# EAGLE board midi_shield48_v1 (EAGLE 6.2)
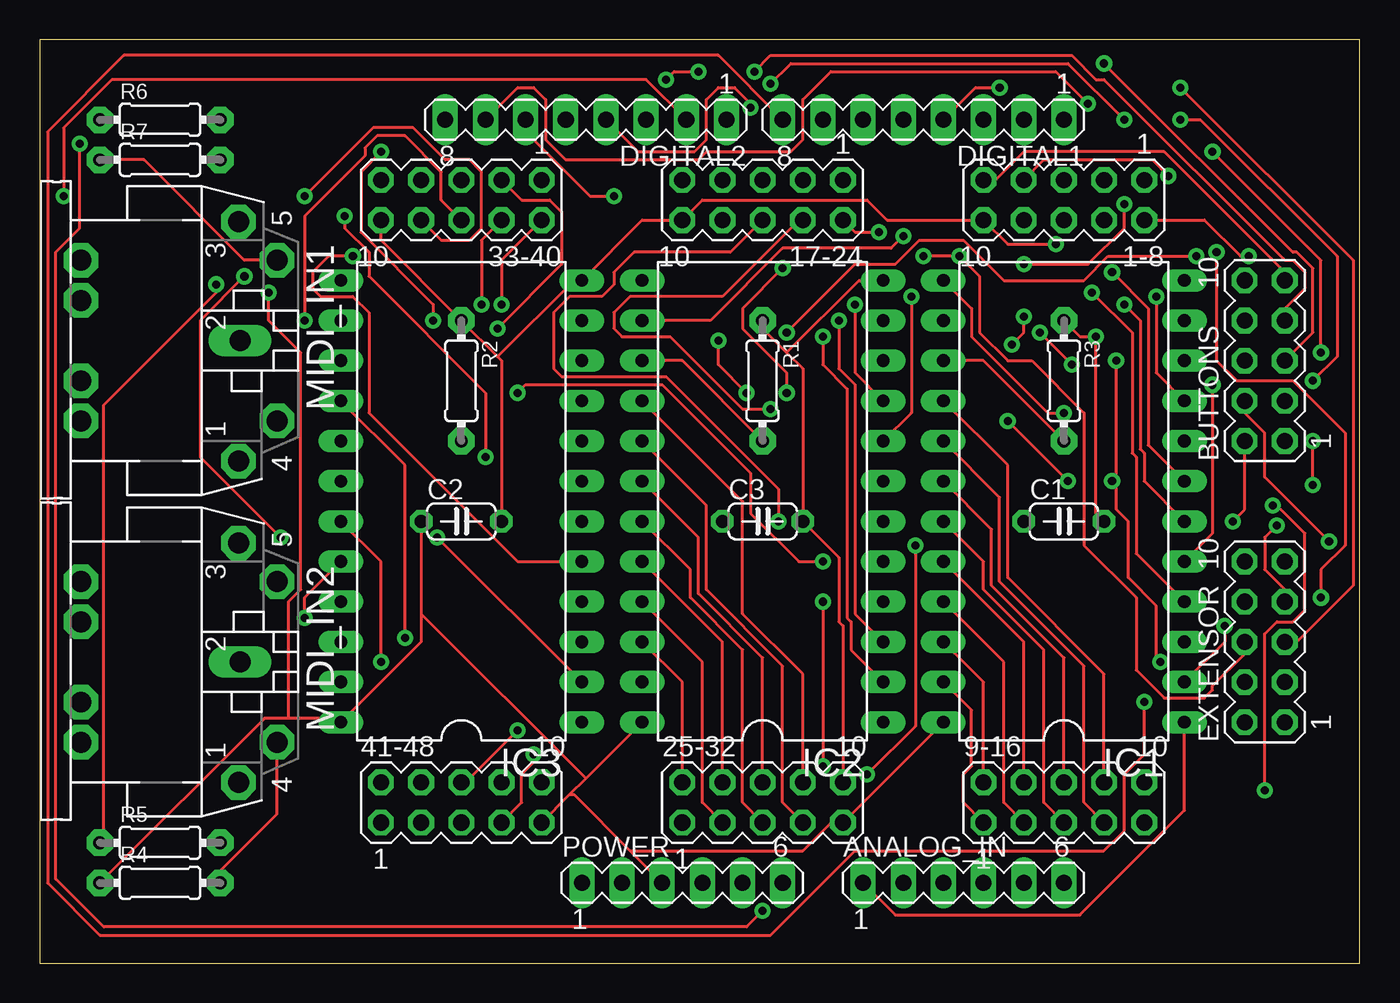
[diagram p0: board, top side]
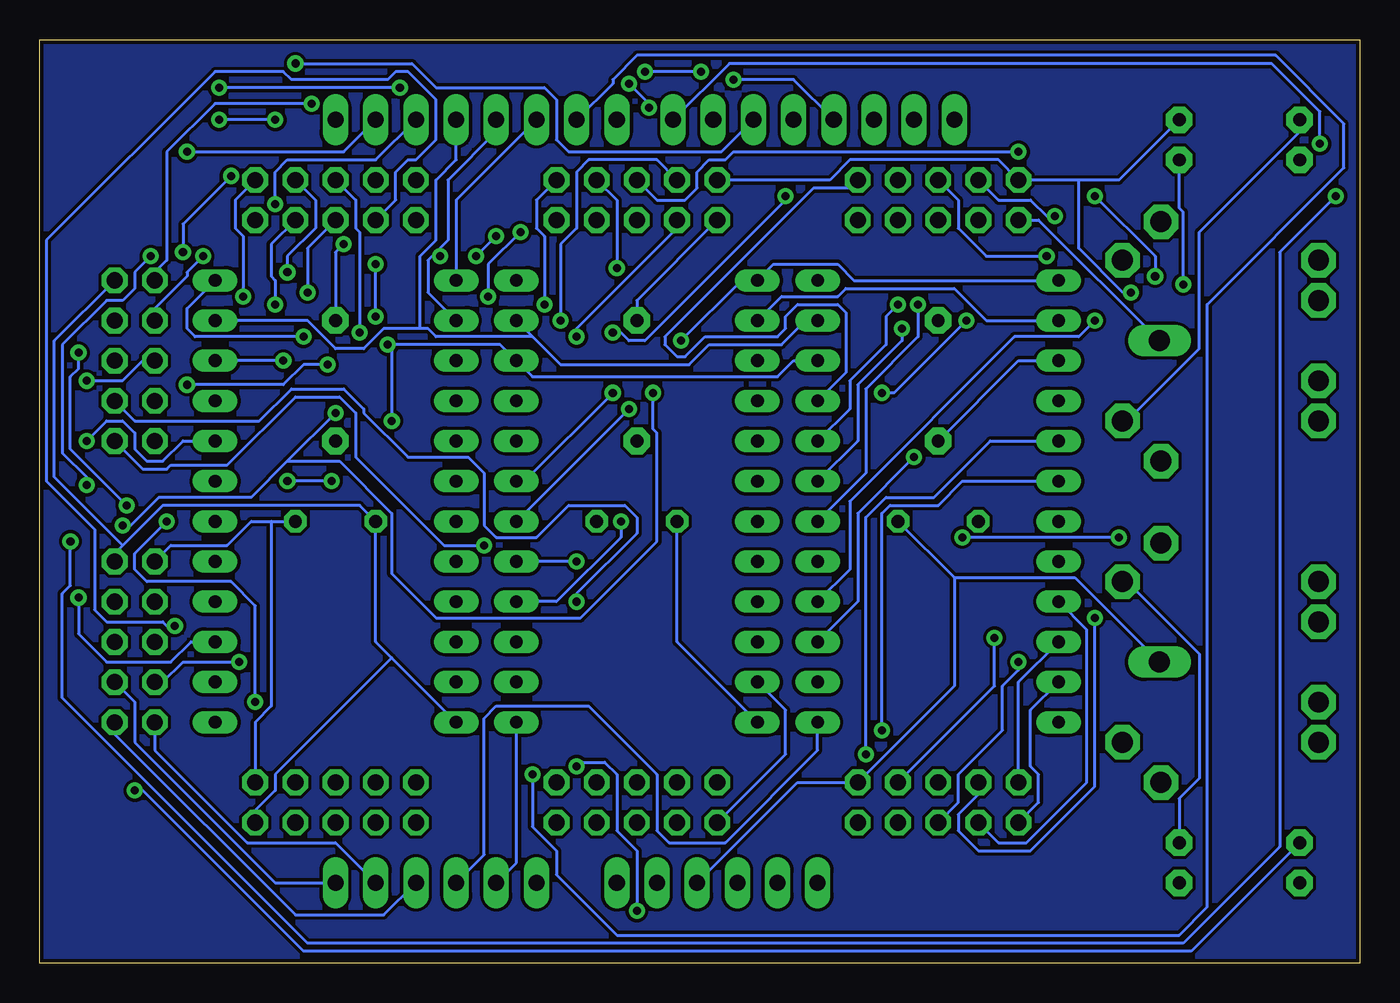
[diagram p1: board, bottom side, seen from below]

Size 83.49 x 58.41 mm. Coordinates in mm from the lower left corner, seen from the top.
Outline: 0,0 83.49,0 83.49,58.41 0,58.41 0,0
Copper layers (1*16): Top 0.035mm / dielectric 1.5mm / Bottom 0.035mm
Design rules: minimum track width 8mil, minimum drill 20mil, track to track 8mil, track to pad 8mil, pad to pad 8mil, via to via 8mil, smd to smd 8mil, copper to edge 10mil, drill to drill 8mil, minimum pad ring 12mil, minimum via ring 10mil, stop-mask expansion 4mil, vias tented up to drill 25mil, thermal gap 10mil

## Footprints (pad centres in the part's own frame; a part is rotated, then mirrored left to right if it is on the bottom)
MA05-2 = drill 1.016 octagon: 1 -5.08,-1.27; 2 -5.08,1.27; 3 -2.54,-1.27; 4 -2.54,1.27; 5 0,-1.27; 6 0,1.27; 7 2.54,-1.27; 8 2.54,1.27; 9 5.08,-1.27; 10 5.08,1.27
MA06-1 = drill 1.016 long: 1 -6.35,0; 2 -3.81,0; 3 -1.27,0; 4 1.27,0; 5 3.81,0; 6 6.35,0
C050-024X044 = drill 0.813 octagon: 1 -2.54,0; 2 2.54,0
MA08-1 = drill 1.016 long: 1 -8.89,0; 2 -6.35,0; 3 -3.81,0; 4 -1.27,0; 5 1.27,0; 6 3.81,0; 7 6.35,0; 8 8.89,0
DIL24-6 = drill 0.813 long: 1 -13.97,-7.62; 2 -11.43,-7.62; 3 -8.89,-7.62; 4 -6.35,-7.62; 5 -3.81,-7.62; 6 -1.27,-7.62; 7 1.27,-7.62; 8 3.81,-7.62; 9 6.35,-7.62; 10 8.89,-7.62; 11 11.43,-7.62; 12 13.97,-7.62; 13 13.97,7.62; 14 11.43,7.62; 15 8.89,7.62; 16 6.35,7.62; 17 3.81,7.62; 18 1.27,7.62; 19 -1.27,7.62; 20 -3.81,7.62; 21 -6.35,7.62; 22 -8.89,7.62; 23 -11.43,7.62; 24 -13.97,7.62
CP-2350 = drill 1.321 pad 2.184 octagon: 1 7.62,12.58; 3 -7.52,12.58; 4 5.08,15.02; 5 -5.08,15.02; PE -2.54,2.62; PE1 -5.08,2.62; PE2 5.08,2.62; PE@ 2.54,2.62 | drill 1.321 long: 2 0,12.68
0204/7 = drill 0.813 pad 1.676 octagon: 1 -3.81,0; 2 3.81,0

## Placement (x,y rotation side)
1-8  [MA05-2]  64.77,48.26 180 top
9-16  [MA05-2]  64.77,10.16 0 top
17-24  [MA05-2]  45.72,48.26 180 top
25-32  [MA05-2]  45.72,10.16 0 top
33-40  [MA05-2]  26.67,48.26 180 top
41-48  [MA05-2]  26.67,10.16 0 top
ANALOG_IN  [MA06-1]  58.42,5.08 0 top
BUTTONS  [MA05-2]  77.47,38.1 90 top
C1  0.1uF  [C050-024X044]  64.77,27.94 0 top
C2  0.1uF  [C050-024X044]  26.67,27.94 0 top
C3  0.1uF  [C050-024X044]  45.72,27.94 0 top
DIGITAL1  [MA08-1]  55.88,53.34 180 top
DIGITAL2  [MA08-1]  34.54,53.34 180 top
EXTENSOR  [MA05-2]  77.47,20.32 90 top
IC1  4067N  [DIL24-6]  64.77,29.21 90 top
IC2  4067N  [DIL24-6]  45.72,29.21 90 top
IC3  4067N  [DIL24-6]  26.67,29.21 90 top
MIDI_IN1  MIDIJACK  [CP-2350]  0,39.37 270 top
MIDI_IN2  MIDIJACK  [CP-2350]  0,19.05 270 top
POWER  [MA06-1]  40.64,5.08 0 top
R1  10k  [0204/7]  45.72,36.83 270 top
R2  10k  [0204/7]  26.67,36.83 270 top
R3  10k  [0204/7]  64.77,36.83 270 top
R4  220  [0204/7]  7.62,5.08 0 top
R5  220  [0204/7]  7.62,7.62 0 top
R6  220  [0204/7]  7.62,53.34 0 top
R7  220  [0204/7]  7.62,50.8 0 top

## Library data of the parts
1-8 9-16 17-24 25-32 33-40 41-48 ANALOG_IN BUTTONS DIGITAL1 DIGITAL2 EXTENSOR POWER = con-lstb; OC_FARNELL: unknown; OC_NEWARK: unknown
C1-C3 MIDI_IN1 MIDI_IN2 R1-R7 = adafruit
IC1-IC3 = 40xx

## Nets
ACOMM1: ANALOG_IN.1 IC1.1
ACOMM2: ANALOG_IN.2 IC2.1
ACOMM3: ANALOG_IN.3 IC3.1
ACOMM4: ANALOG_IN.4 EXTENSOR.1
ACOMM5: ANALOG_IN.5 EXTENSOR.2
ACOMM6: ANALOG_IN.6 EXTENSOR.3
AREF: DIGITAL2.8
BUTTON1: BUTTONS.1 DIGITAL1.7
BUTTON2: BUTTONS.2 DIGITAL1.8
BUTTON3: BUTTONS.3 DIGITAL2.1
BUTTON4: BUTTONS.4 DIGITAL2.2
DIGITAL_GND: BUTTONS.10 DIGITAL2.7
GND: 1-8.10 9-16.10 17-24.10 25-32.10 33-40.10 41-48.10 C1.2 C2.2 C3.2 EXTENSOR.10 IC1.12 IC2.12 IC3.12 MIDI_IN1.2 MIDI_IN2.2 POWER.4 R1.1 R2.1 R3.1
LED1: BUTTONS.5 DIGITAL2.3
LED2: BUTTONS.6 DIGITAL2.4
LED3: BUTTONS.7 DIGITAL2.5
LED4: BUTTONS.8 DIGITAL2.6
M1P1: 1-8.1 IC1.9
M1P2: 1-8.2 IC1.8
M1P3: 1-8.3 IC1.7
M1P4: 1-8.4 IC1.6
M1P5: 1-8.5 IC1.5
M1P6: 1-8.6 IC1.4
M1P7: 1-8.7 IC1.3
M1P8: 1-8.8 IC1.2
M1P9: 9-16.1 IC1.23
M1P10: 9-16.2 IC1.22
M1P11: 9-16.3 IC1.21
M1P12: 9-16.4 IC1.20
M1P13: 9-16.5 IC1.19
M1P14: 9-16.6 IC1.18
M1P15: 9-16.7 IC1.17
M1P16: 9-16.8 IC1.16
M2P1: 17-24.1 IC2.9
M2P2: 17-24.2 IC2.8
M2P3: 17-24.3 IC2.7
M2P4: 17-24.4 IC2.6
M2P5: 17-24.5 IC2.5
M2P6: 17-24.6 IC2.4
M2P7: 17-24.7 IC2.3
M2P8: 17-24.8 IC2.2
M2P9: 25-32.1 IC2.23
M2P10: 25-32.2 IC2.22
M2P11: 25-32.3 IC2.21
M2P12: 25-32.4 IC2.20
M2P13: 25-32.5 IC2.19
M2P14: 25-32.6 IC2.18
M2P15: 25-32.7 IC2.17
M2P16: 25-32.8 IC2.16
M3P1: 33-40.1 IC3.9
M3P2: 33-40.2 IC3.8
M3P3: 33-40.3 IC3.7
M3P4: 33-40.4 IC3.6
M3P5: 33-40.5 IC3.5
M3P6: 33-40.6 IC3.4
M3P7: 33-40.7 IC3.3
M3P8: 33-40.8 IC3.2
M3P9: 41-48.1 IC3.23
M3P10: 41-48.2 IC3.22
M3P11: 41-48.3 IC3.21
M3P12: 41-48.4 IC3.20
M3P13: 41-48.5 IC3.19
M3P14: 41-48.6 IC3.18
M3P15: 41-48.7 IC3.17
M3P16: 41-48.8 IC3.16
MIDITX: DIGITAL1.2 R5.1 R7.2
N$52: IC1.15 R3.2
N$53: IC2.15 R1.2
N$54: IC3.15 R2.2
N$55: MIDI_IN2.5 R5.2
N$56: MIDI_IN2.4 R4.2
N$57: MIDI_IN1.5 R7.1
N$58: MIDI_IN1.4 R6.1
S0: DIGITAL1.3 EXTENSOR.4 IC1.10 IC2.10 IC3.10
S1: DIGITAL1.4 EXTENSOR.5 IC1.11 IC2.11 IC3.11
S2: DIGITAL1.5 EXTENSOR.6 IC1.14 IC2.14 IC3.14
S3: DIGITAL1.6 EXTENSOR.7 IC1.13 IC2.13 IC3.13
VCC: 1-8.9 9-16.9 17-24.9 25-32.9 33-40.9 41-48.9 BUTTONS.9 C1.1 C2.1 C3.1 EXTENSOR.9 IC1.24 IC2.24 IC3.24 POWER.3 R4.1 R6.2

## Tracks (layer width: path | path; a pad name or v marks a point on that pad's centre or on a via)
ACOMM1
  Top 0.203: IC1.1 72.39,9.65 65.79,3.05 54.1,3.05 ANALOG_IN.1
ACOMM2
  Bottom 0.203: IC2.1 53.34,6.35 ANALOG_IN.2
ACOMM3
  Bottom 0.203: IC3.1 34.29,13.46 40.13,7.62 43.69,7.62 44.45,8.38 44.45,11.94 48.77,16.26 54.61,16.26 55.37,15.49 55.37,6.86 ANALOG_IN.3
ACOMM4
  Bottom 0.203: ANALOG_IN.4 61.72,3.05 67.31,3.05 78.74,14.48 EXTENSOR.1
ACOMM5
  Bottom 0.203: ANALOG_IN.5 64.77,7.62 70.36,7.62 76.2,13.46 EXTENSOR.2
ACOMM6
  Bottom 0.203: ANALOG_IN.6 68.58,5.08 77.47,13.97 77.47,16.51 EXTENSOR.3
BUTTON1  (via drill 0.51)
  Top 0.203: v52.32,11.94 55.37,14.99 v55.37,26.42
  Bottom 0.203: DIGITAL1.7 47.24,55.63 47.24,55.88 45.72,57.4 5.33,57.4 1.02,53.09 1.02,50.29 9.65,41.66 9.65,3.56 11.43,1.78 46.99,1.78 50.8,5.59 50.8,7.11 52.32,8.64 v52.32,11.94 | v55.37,26.42 57.91,26.42 63.5,32 63.5,34.8 64.52,35.81 67.31,35.81 71.63,31.5 75.18,31.5 75.44,31.24 76.96,31.24 BUTTONS.1
BUTTON2  (via drill 0.51)
  Top 0.203: BUTTONS.2 76.2,28.7 v75.44,27.94 | v69.85,16.51 69.85,13.21 68.58,11.94 68.58,8.38 67.31,7.11 51.56,7.11 46.23,1.78 3.81,1.78 0.51,5.08 0.51,52.58 5.33,57.4 42.93,57.4 DIGITAL1.8
  Bottom 0.203: v75.44,27.94 77.47,25.91 77.47,24.89 76.71,24.13 71.37,24.13 69.85,22.61 v69.85,16.51
BUTTON3  (via drill 0.51)
  Top 0.203: v2.54,51.82 2.54,46.48 1.02,44.96 1.02,5.33 4.06,2.29 44.7,2.29 v45.72,3.3 | v49.53,22.86 v49.53,12.45
  Bottom 0.203: DIGITAL2.1 39.88,56.9 5.59,56.9 2.54,53.85 v2.54,51.82 | v45.72,3.3 45.72,7.11 46.99,8.38 46.99,11.94 47.75,12.7 49.28,12.7 v49.53,12.45 | v49.53,22.86 49.53,23.37 45.72,27.18 45.72,28.19 46.48,28.96 50.04,28.96 52.07,26.92 54.61,26.92 55.37,27.69 55.37,30.99 56.39,32 60.2,32 62.99,34.8 62.99,35.05 64.26,36.32 67.56,36.32 69.6,34.29 77.47,34.29 BUTTONS.3
BUTTON4  (via drill 0.51)
  Top 0.203: BUTTONS.4 76.2,34.8 77.47,33.53 77.47,30.73 v81.53,26.67 | v1.52,48.51 1.52,52.83 4.57,55.88 38.35,55.88 DIGITAL2.2
  Bottom 0.203: v81.53,26.67 81.53,23.88 82.04,23.37 82.04,16.76 66.55,1.27 11.18,1.27 5.08,7.37 5.08,44.96 v1.52,48.51
DIGITAL_GND  (via drill 0.51)
  Top 0.203: v66.29,54.36 64.26,56.39 50.04,56.39 48.26,54.61 48.26,52.07 47.5,51.31 42.16,51.31 41.66,50.8 33.27,50.8 32,52.07 32,54.61 31.24,55.37 30.23,55.37 DIGITAL2.7
  Bottom 0.203: BUTTONS.10 76.2,43.69 75.44,44.45 75.44,51.31 72.39,54.36 v66.29,54.36
GND  (via drill 0.51)
  Top 0.203: R3.1 65.79,39.62 v66.8,39.62 66.8,28.45 C1.2 | 47.24,38.61 45.72,40.13 R1.1 | 47.24,38.61 48.26,37.59 C3.2 50.55,25.65 50.55,21.59 50.8,21.34 25-32.10 | IC2.12 51.82,43.18 47.24,38.61 | C2.2 29.21,38.1 28.96,38.35 | 28.96,38.35 R2.1 21.59,45.72 33-40.10 | 28.96,38.35 33.78,43.18 IC3.12 38.1,46.99 17-24.10 41.91,48.26 52.32,48.26 53.59,46.99 1-8.10 61.21,45.47 v64.26,45.47
  Bottom 0.203: IC1.12 74.17,41.4 74.17,40.13 73.66,39.62 v66.8,39.62 | 68.83,27.94 70.1,27.94 71.63,26.42 75.18,26.42 EXTENSOR.10 | 68.83,27.94 C1.2 | 9-16.10 69.85,15.24 68.83,16.26 68.83,27.94 | POWER.4 35.56,11.43 41-48.10 25.65,17.53 25.65,24.38 | 25.65,24.38 18.03,24.38 12.7,19.05 MIDI_IN2.2 | C2.2 25.65,24.38 | 33-40.10 20.32,46.99 12.7,39.37 MIDI_IN1.2 | R1.1 45.72,41.91 17-24.10 | R3.1 64.77,44.96 v64.26,45.47
LED1  (via drill 0.51)
  Top 0.203: v67.31,56.9 79.25,44.96 79.5,44.96 80.52,43.94 80.52,39.88 BUTTONS.5
  Bottom 0.203: DIGITAL2.3 40.39,51.31 50.04,51.31 50.8,52.07 50.8,54.61 51.56,55.37 58.42,55.37 59.94,56.9 v67.31,56.9
LED2  (via drill 0.51)
  Top 0.203: v80.52,36.83 82.04,38.35 82.04,44.7 73.41,53.34 v72.14,53.34 | v68.58,53.34 65.02,56.9 47.5,56.9 v46.23,55.63 | v44.96,54.1 44.96,54.36 43.94,55.37 42.93,55.37 42.16,54.61 42.16,52.07 41.4,51.31 37.85,51.31 DIGITAL2.4
  Bottom 0.203: BUTTONS.6 76.96,38.1 78.23,36.83 v80.52,36.83 | v68.58,53.34 v72.14,53.34 | v46.23,55.63 44.96,54.36 v44.96,54.1
LED3  (via drill 0.51)
  Top 0.203: BUTTONS.7 78.74,41.4 80.01,42.67 80.01,43.69 79.25,44.45 78.74,44.45 67.31,55.88 66.8,55.88 65.28,57.4 46.23,57.4 v45.21,56.39 | v41.66,56.39 40.13,56.39 v39.62,55.88
  Bottom 0.203: v41.66,56.39 v45.21,56.39 | v39.62,55.88 35.81,55.88 DIGITAL2.5
LED4  (via drill 0.51)
  Top 0.203: v73.15,44.7 67.56,44.7 66.04,43.18 60.96,43.18 58.42,45.72 55.63,45.72 54.1,44.2 51.56,44.2 v47.24,39.88 | v36.32,48.51 34.8,48.51 30.73,52.58 DIGITAL2.6
  Bottom 0.203: BUTTONS.8 76.2,41.4 74.17,43.43 74.17,43.69 v73.15,44.7 | v47.24,39.88 46.74,39.88 46.23,39.37 45.21,39.37 36.32,48.26 v36.32,48.51
M1P1  (via drill 0.51)
  Top 0.203: IC1.9 70.61,37.34 v70.61,42.16
  Bottom 0.203: v70.61,42.16 70.61,45.97 71.12,46.48 71.12,48.26 1-8.1
M1P2  (via drill 0.51)
  Top 0.203: v80.52,30.23 v80.52,33.02 | v76.45,44.7 75.95,44.7 73.66,46.99 1-8.2
  Bottom 0.203: IC1.8 74.42,33.02 75.69,31.75 76.71,31.75 77.47,32.51 77.47,33.53 78.23,34.29 79.25,34.29 v80.52,33.02 | v80.52,30.23 80.52,30.73 82.04,32.26 82.04,39.12 79.25,41.91 78.23,41.91 77.47,42.67 77.47,43.69 v76.45,44.7
M1P3  (via drill 0.51)
  Top 0.203: IC1.7 70.1,32.77 70.1,41.4 v67.82,43.69
  Bottom 0.203: v67.82,43.69 67.82,44.7 66.04,46.48 66.04,48.26 1-8.3
M1P4  (via drill 0.51)
  Top 0.203: IC1.6 69.85,30.48 69.85,32.26 69.6,32.51 69.6,40.64 v68.58,41.66
  Bottom 0.203: v68.58,41.66 68.58,43.18 68.83,43.43 68.83,45.47 1-8.4
M1P5  (via drill 0.51)
  Top 0.203: IC1.5 74.17,27.18 v74.17,36.58 | v63.25,39.88 v65.28,37.85
  Bottom 0.203: v74.17,36.58 68.07,36.58 66.8,37.85 v65.28,37.85 | v63.25,39.88 63.25,46.23 63.5,46.48 63.5,48.26 1-8.5
M1P6  (via drill 0.51)
  Top 0.203: IC1.4 69.34,25.91 69.34,32 69.09,32.26 69.09,39.88 v66.55,42.42
  Bottom 0.203: v66.55,42.42 66.55,45.21 1-8.6
M1P7  (via drill 0.51)
  Top 0.203: v81.03,23.11 81.03,24.89 82.55,26.42 82.55,33.53 79.25,36.83 75.69,36.83 74.42,38.1 v74.42,44.96 | v71.37,49.78 70.36,50.8 63.5,50.8 1-8.7
  Bottom 0.203: IC1.3 73.91,20.32 75.18,19.05 79.25,19.05 81.03,20.83 v81.03,23.11 | v74.42,44.96 74.42,46.74 v71.37,49.78
M1P8  (via drill 0.51)
  Top 0.203: IC1.2 74.93,20.32 v74.93,21.34
  Bottom 0.203: v74.93,21.34 75.44,21.34 75.69,21.59 79.25,21.59 80.01,22.35 80.01,27.43 83.06,30.48 83.06,45.72 72.39,56.39 68.07,56.39 67.56,55.88 61.47,55.88 60.96,56.39 60.2,56.39 58.42,54.61 58.42,52.07 59.69,50.8 60.2,50.8 60.96,50.04 60.96,48.26 1-8.8
M1P9
  Top 0.203: IC1.23 58.93,16 58.93,12.45 58.42,11.94 58.42,10.16 9-16.1
M1P10
  Top 0.203: IC1.22 59.69,17.78 9-16.2
M1P11
  Top 0.203: IC1.21 60.96,19.05 60.96,10.16 9-16.3
M1P12
  Top 0.203: IC1.20 62.23,20.32 9-16.4
M1P13
  Top 0.203: IC1.19 59.69,25.4 59.69,23.62 63.5,19.81 63.5,10.16 9-16.5
M1P14
  Top 0.203: IC1.18 60.2,27.43 60.2,23.88 64.77,19.3 9-16.6
M1P15
  Top 0.203: IC1.17 60.71,29.46 60.71,24.13 66.04,18.8 66.04,10.16 9-16.7
M1P16
  Top 0.203: IC1.16 61.21,31.5 61.21,24.38 67.31,18.29 9-16.8
M2P1  (via drill 0.51)
  Top 0.203: IC2.9 51.56,37.34 v51.56,41.66
  Bottom 0.203: v51.56,41.66 51.56,45.97 52.07,46.48 52.07,48.26 17-24.1
M2P2  (via drill 0.51)
  Top 0.203: IC2.8 55.12,34.8 v55.12,42.16 | v53.09,46.23 51.56,46.23 17-24.2
  Bottom 0.203: v55.12,42.16 55.12,44.2 v53.09,46.23
M2P3  (via drill 0.51)
  Top 0.203: v47.24,36.07 47.24,37.34 44.45,40.13 44.45,41.4 v46.99,43.94
  Bottom 0.203: IC2.7 52.83,30.48 v47.24,36.07 | v46.99,43.94 46.99,48.26 17-24.3
M2P4  (via drill 0.51)
  Top 0.203: v46.23,35.05 44.45,35.05 39.88,39.62 36.83,39.62 36.32,40.13 36.32,41.15 37.34,42.16 43.18,42.16 48.01,46.99 17-24.4
  Bottom 0.203: v46.23,35.05 IC2.6
M2P5  (via drill 0.51)
  Top 0.203: v49.53,25.4 48.01,25.4 44.96,28.45 44.96,30.99 39.37,36.58 30.73,36.58 v30.23,36.07 | v24.89,40.64 24.89,41.66 20.32,46.23 20.32,50.04 v21.59,51.31
  Bottom 0.203: v49.53,25.4 IC2.5 | v30.23,36.07 29.46,36.07 v24.89,40.64 | v21.59,51.31 39.62,51.31 40.13,50.8 41.15,50.8 41.91,50.04 41.91,49.02 42.67,48.26 44.45,48.26 17-24.5
M2P6  (via drill 0.51)
  Top 0.203: v46.74,27.94 46.74,29.97 39.62,37.08 33.02,37.08 32.51,37.59 32.51,41.15 33.53,42.16 35.56,42.16 36.32,42.93 36.32,43.69 37.59,44.96 43.69,44.96 17-24.6
  Bottom 0.203: IC2.4 50.8,22.86 46.74,26.92 v46.74,27.94
M2P7  (via drill 0.51)
  Top 0.203: IC2.3 51.56,22.1 51.56,36.58 50.55,37.59 v50.55,40.64
  Bottom 0.203: v50.55,40.64 50.55,45.47 49.53,46.48 49.53,50.04 48.77,50.8 44.45,50.8 17-24.7
M2P8  (via drill 0.51)
  Top 0.203: IC2.2 51.31,19.81 51.31,21.59 51.05,21.84 51.05,36.32 49.53,37.85 v49.53,39.62
  Bottom 0.203: v49.53,39.62 49.53,40.13 43.18,46.48 17-24.8
M2P9
  Bottom 0.203: IC2.23 36.32,16 36.32,13.21 25-32.1
M2P10
  Top 0.203: IC2.22 40.64,17.78 25-32.2
M2P11
  Top 0.203: IC2.21 41.91,19.05 41.91,10.16 25-32.3
M2P12
  Top 0.203: IC2.20 43.18,20.32 25-32.4
M2P13
  Top 0.203: IC2.19 41.15,24.89 41.15,23.11 44.45,19.81 44.45,10.16 25-32.5
M2P14
  Top 0.203: IC2.18 41.66,26.92 41.66,23.37 45.72,19.3 25-32.6
M2P15
  Top 0.203: IC2.17 42.16,28.96 42.16,23.62 46.99,18.8 46.99,10.16 25-32.7
M2P16
  Top 0.203: IC2.16 44.45,29.21 44.45,22.1 48.26,18.29 25-32.8
M3P1
  Bottom 0.203: IC3.9 32.51,37.34 32.51,41.15 33.02,41.66 35.56,41.66 36.32,40.89 36.32,40.13 36.83,39.62 41.4,39.62 42.67,38.35 43.18,38.35 43.94,39.12 43.94,39.62 34.54,49.02 32.26,49.02 33-40.1
M3P2  (via drill 0.51)
  Top 0.203: v29.21,41.66 29.21,44.45 33-40.2
  Bottom 0.203: IC3.8 32.26,35.05 32.26,36.83 29.97,39.12 29.97,40.89 v29.21,41.66
M3P3  (via drill 0.51)
  Top 0.203: v28.96,40.13 33.02,44.2 33.02,47.5 32.26,48.26 30.48,48.26 33-40.3
  Bottom 0.203: IC3.7 31.75,33.02 31.75,36.58 28.96,39.37 v28.96,40.13
M3P4  (via drill 0.51)
  Top 0.203: v27.94,41.66 27.94,45.72 33-40.4
  Bottom 0.203: IC3.6 31.24,30.99 31.24,36.32 27.94,39.62 v27.94,41.66
M3P5  (via drill 0.51)
  Top 0.203: IC3.5 30.23,25.4 20.83,34.8 20.83,41.15 19.81,42.16 17.78,42.16 17.27,42.67 17.27,43.69 18.29,44.7 v19.81,44.7
  Bottom 0.203: v19.81,44.7 23.62,44.7 25.4,46.48 25.4,48.26 33-40.5
M3P6  (via drill 0.51)
  Top 0.203: v16.76,40.64 16.76,47.24 20.57,51.05 20.57,51.56 21.34,52.32 23.11,52.32 25.4,50.04 25.4,48.26 33-40.6
  Bottom 0.203: IC3.4 32.26,24.89 32.26,29.21 21.84,39.62 17.78,39.62 v16.76,40.64
M3P7  (via drill 0.51)
  Top 0.203: v28.19,32 28.19,36.07 20.83,43.43 20.83,44.96 19.3,46.48 v19.3,47.24
  Bottom 0.203: IC3.3 31.75,22.86 31.75,28.45 v28.19,32 | v19.3,47.24 19.81,47.24 20.83,48.26 22.86,48.26 33-40.7
M3P8  (via drill 0.51)
  Top 0.203: v25.15,26.92 IC3.2 | v15.24,26.92 10.16,32 10.16,40.64 v12.95,43.43 | v16.76,48.51 21.08,52.83 23.62,52.83 25.65,50.8 27.18,50.8 27.94,50.04 27.94,46.48 27.18,45.72 25.4,45.72 33-40.8
  Bottom 0.203: v15.24,26.92 v25.15,26.92 | v12.95,43.43 12.95,44.7 v16.76,48.51
M3P9
  Bottom 0.203: IC3.23 20.83,16 20.83,12.45 20.32,11.94 20.32,10.16 41-48.1
M3P10
  Bottom 0.203: IC3.22 21.59,17.78 41-48.2
M3P11
  Bottom 0.203: IC3.21 17.27,21.08 17.27,11.43 21.08,7.62 22.86,7.62 41-48.3
M3P12  (via drill 0.51)
  Top 0.203: IC3.20 16.76,23.11 v16.76,21.84
  Bottom 0.203: v16.76,21.84 16.76,11.18 20.83,7.11 24.13,7.11 25.4,8.38 25.4,9.4 24.13,10.67 41-48.4
M3P13  (via drill 0.51)
  Top 0.203: IC3.19 21.59,25.4 v21.59,19.05
  Bottom 0.203: v21.59,19.05 21.59,18.54 22.61,17.53 22.61,14.73 25.4,11.94 25.4,10.16 41-48.5
M3P14  (via drill 0.51)
  Top 0.203: v30.23,14.73 26.92,11.43 41-48.6
  Bottom 0.203: IC3.18 25.15,30.48 26.67,28.96 29.72,28.96 30.23,28.45 v30.23,14.73
M3P15  (via drill 0.51)
  Top 0.203: v31.24,13.21 31.24,12.7 30.48,11.94 30.48,10.16 41-48.7
  Bottom 0.203: IC3.17 23.37,33.02 26.92,29.46 29.97,29.46 31.24,28.19 v31.24,13.21
M3P16  (via drill 0.51)
  Top 0.203: IC3.16 23.11,31.5 v23.11,20.57
  Bottom 0.203: v23.11,20.57 23.11,17.53 41-48.8
MIDITX  (via drill 0.51)
  Top 0.203: v74.17,51.31 81.03,44.45 v81.03,38.61 | v77.98,28.96 78.23,28.96 80.01,27.18 80.01,22.35 79.25,21.59 78.23,21.59 77.47,20.83 v77.47,10.92 | v11.18,42.93 11.18,42.42 4.06,35.31 4.06,7.87 R5.1
  Bottom 0.203: DIGITAL1.2 64.26,51.31 v74.17,51.31 | v81.03,38.61 81.03,37.59 81.53,37.08 81.53,32.51 v77.98,28.96 | v77.47,10.92 76.96,10.92 66.8,0.76 10.67,0.76 R5.1 | R7.2 11.43,47.75 11.18,47.5 v11.18,42.93
N$1
  pour Bottom: 0,58.42 83.82,58.42 83.82,0 0,0
N$52
  Top 0.203: IC1.15 59.69,38.1 R3.2
N$53
  Top 0.203: IC2.15 40.64,38.1 R1.2
N$54
  Bottom 0.203: IC3.15 21.59,38.1 R2.2
N$55
  Bottom 0.203: R5.2 11.43,10.41 10.16,11.68 10.16,19.56 14.73,24.13 MIDI_IN2.5
N$56
  Top 0.203: R4.2 11.43,5.84 14.99,9.4 14.99,13.97 MIDI_IN2.4
N$57
  Top 0.203: R7.1 6.6,50.8 12.95,44.45 MIDI_IN1.5
N$58
  Bottom 0.203: R6.1 3.81,52.58 10.16,46.23 10.16,38.86 14.73,34.29 MIDI_IN1.4
S0  (via drill 0.51)
  Top 0.203: 68.07,30.48 68.07,28.7 68.83,27.94 68.83,24.38 70.61,22.61 70.61,19.3 v70.87,19.05 | 68.07,30.48 v68.07,38.1 | v68.58,48.01 68.58,46.48 66.29,44.2 v62.23,44.2 | v62.23,40.89 62.23,39.88 v61.47,39.12 | v67.82,30.48 68.07,30.48 | v61.21,34.29 v65.02,30.48
  Bottom 0.203: v68.07,38.1 IC1.10 | v70.87,19.05 74.42,19.05 75.69,17.78 EXTENSOR.4 | IC3.10 35.81,38.1 36.83,37.08 52.32,37.08 IC2.10 54.36,39.12 61.21,39.12 | DIGITAL1.3 62.23,50.8 67.82,50.8 68.58,50.04 v68.58,48.01 | v62.23,40.89 v62.23,44.2 | v65.02,30.48 v67.82,30.48 | 61.21,39.12 v61.21,34.29 | 61.21,39.12 v61.47,39.12
S1  (via drill 0.51)
  Top 0.203: EXTENSOR.5 79.5,20.32 83.06,23.88 83.06,44.45 v72.14,55.37 | v60.71,55.37 59.18,55.37 DIGITAL1.4
  Bottom 0.203: IC3.11 35.05,40.64 36.58,39.12 41.15,39.12 42.42,37.85 50.55,37.85 52.32,39.62 | IC2.11 52.32,39.62 | IC1.11 66.55,40.64 64.77,38.86 62.99,38.86 61.72,40.13 59.44,40.13 | 59.44,40.13 58.93,40.13 58.42,39.62 52.32,39.62 | DIGITAL1.4 57.15,50.8 58.42,49.53 58.42,45.72 59.44,44.7 59.44,40.13 | v60.71,55.37 v72.14,55.37
S2  (via drill 0.51)
  Top 0.203: EXTENSOR.6 76.2,19.56 74.17,17.53 74.17,17.27 73.66,16.76 71.12,16.76 69.34,18.54 69.34,23.11 66.04,26.42 66.04,34.8 62.74,38.1 61.21,38.1 59.44,39.88 59.44,43.43 v58.17,44.7 v55.88,44.7 | IC2.14 42.42,40.64 46.99,45.21 53.85,45.21 v54.61,45.97
  Bottom 0.203: IC3.14 23.62,40.64 25.65,42.67 32.51,42.67 33.02,42.16 36.58,42.16 IC2.14 | IC1.14 58.93,42.42 58.93,44.45 58.42,44.96 | 58.42,44.96 57.66,45.72 57.66,49.53 54.61,52.58 DIGITAL1.5 | 58.42,44.96 v58.17,44.7 | v55.88,44.7 v54.61,45.97
S3  (via drill 0.51)
  Top 0.203: EXTENSOR.7 78.74,23.62 77.47,24.89 77.47,26.92 v78.23,27.69 | v64.77,34.8 63.75,34.8 58.93,39.62 58.93,41.4 IC1.13 | v42.93,39.37 42.93,37.85 v44.7,36.07
  Bottom 0.203: IC3.13 32,43.18 33.02,44.2 37.08,44.2 IC2.13 39.12,43.18 v42.93,39.37 | IC1.13 57.15,48.26 DIGITAL1.6 | v78.23,27.69 77.72,27.69 75.95,29.46 70.1,29.46 67.82,31.75 | v64.77,34.8 67.82,31.75 | v44.7,36.07 44.7,33.78 44.45,33.53 44.45,26.67 49.28,21.84 58.42,21.84 61.21,24.64 61.21,28.45 64.52,31.75 67.82,31.75
VCC  (via drill 0.51)
  Top 0.203: IC1.24 25-32.9 50.04,8.89 48.26,7.11 37.34,7.11 | 1-8.9 60.45,49.53 62.23,51.31 71.12,51.31 78.74,43.69 BUTTONS.9 | 41-48.9 33.53,10.67 | 33.53,10.67 34.54,11.68 | 34.54,11.68 IC2.24 | 37.34,7.11 33.78,10.67 33.53,10.67 | 37.34,7.11 POWER.3 | 19.3,15.49 24.13,20.32 24.13,22.1 | C2.1 24.13,22.1 | R4.1 14.22,15.49 15.75,15.49 | 19.3,15.49 15.75,15.49 | 19.3,15.49 IC3.24 | v14.48,42.42 14.48,40.64 16.51,38.61 16.51,23.62 15.75,22.86 15.75,15.49 | 24.13,22.1 34.54,11.68
  Bottom 0.203: IC1.24 61.21,19.3 | 61.21,19.3 62.23,20.32 C1.1 63.25,28.96 75.69,28.96 78.23,26.42 | 9-16.9 69.85,9.65 68.58,10.92 68.58,11.94 61.21,19.3 | EXTENSOR.9 78.74,25.91 78.23,26.42 | BUTTONS.9 82.55,39.37 82.55,30.73 78.23,26.42 | C3.1 43.18,20.32 IC2.24 | 17.78,49.53 15.24,49.53 R6.2 | 17.78,49.53 33-40.9 22.86,50.8 32.26,50.8 33.53,49.53 17-24.9 | 17.78,49.53 17.78,45.21 14.99,42.42 v14.48,42.42